# EAGLE board Middle Board - Power (EAGLE 8.6.0), part 1 of 2
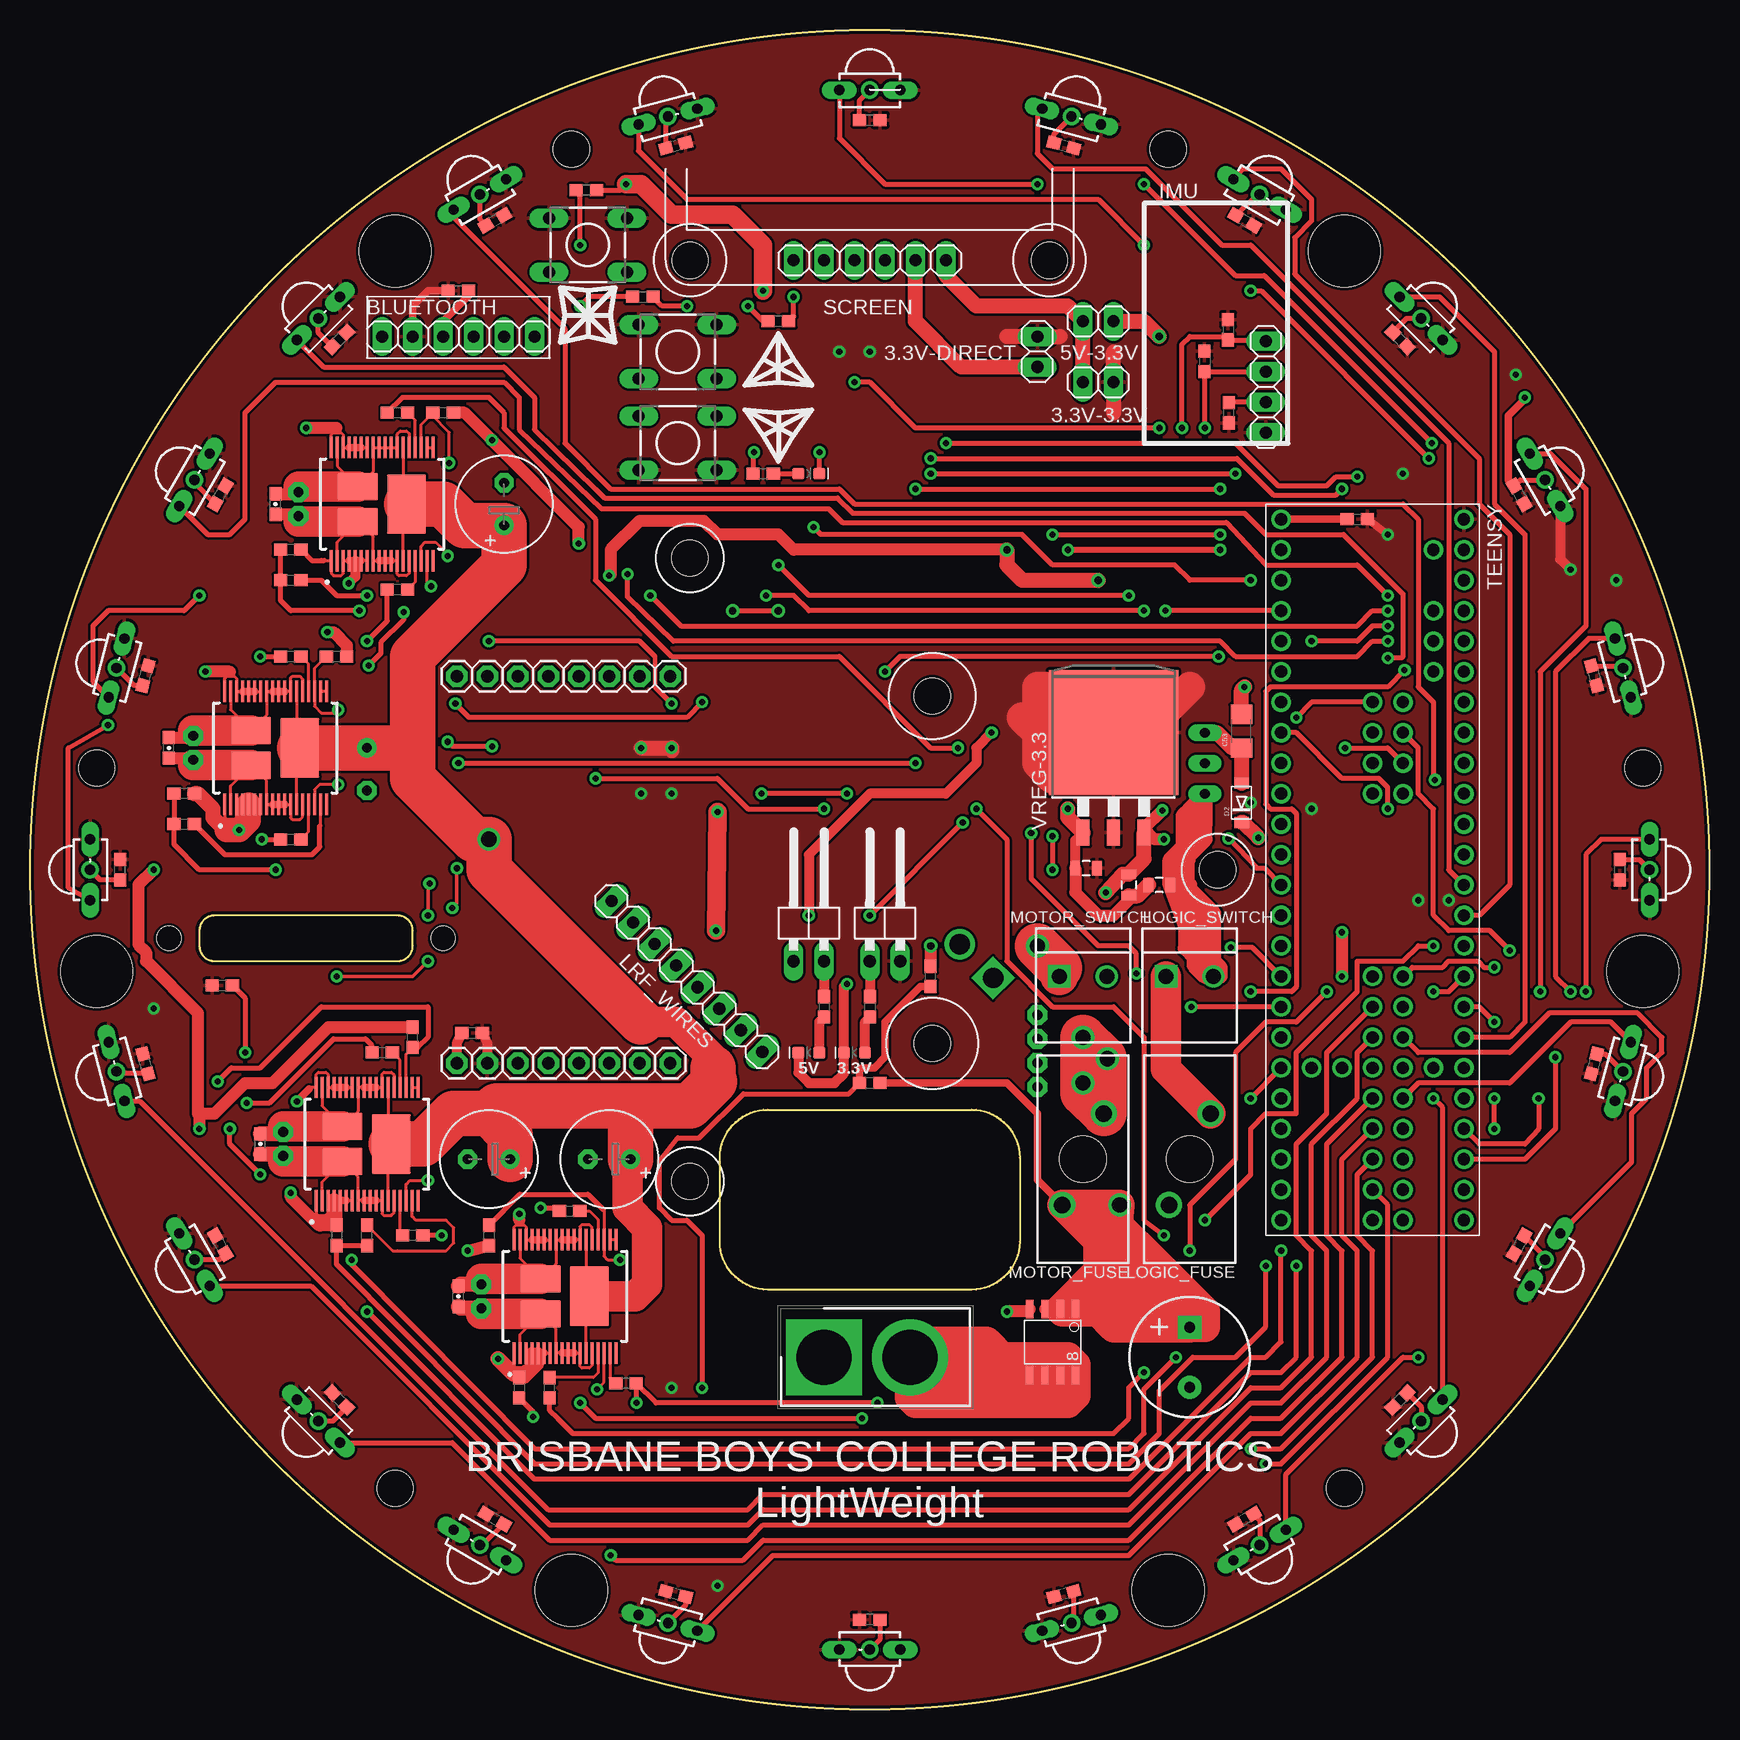
[diagram p0: board, top side]
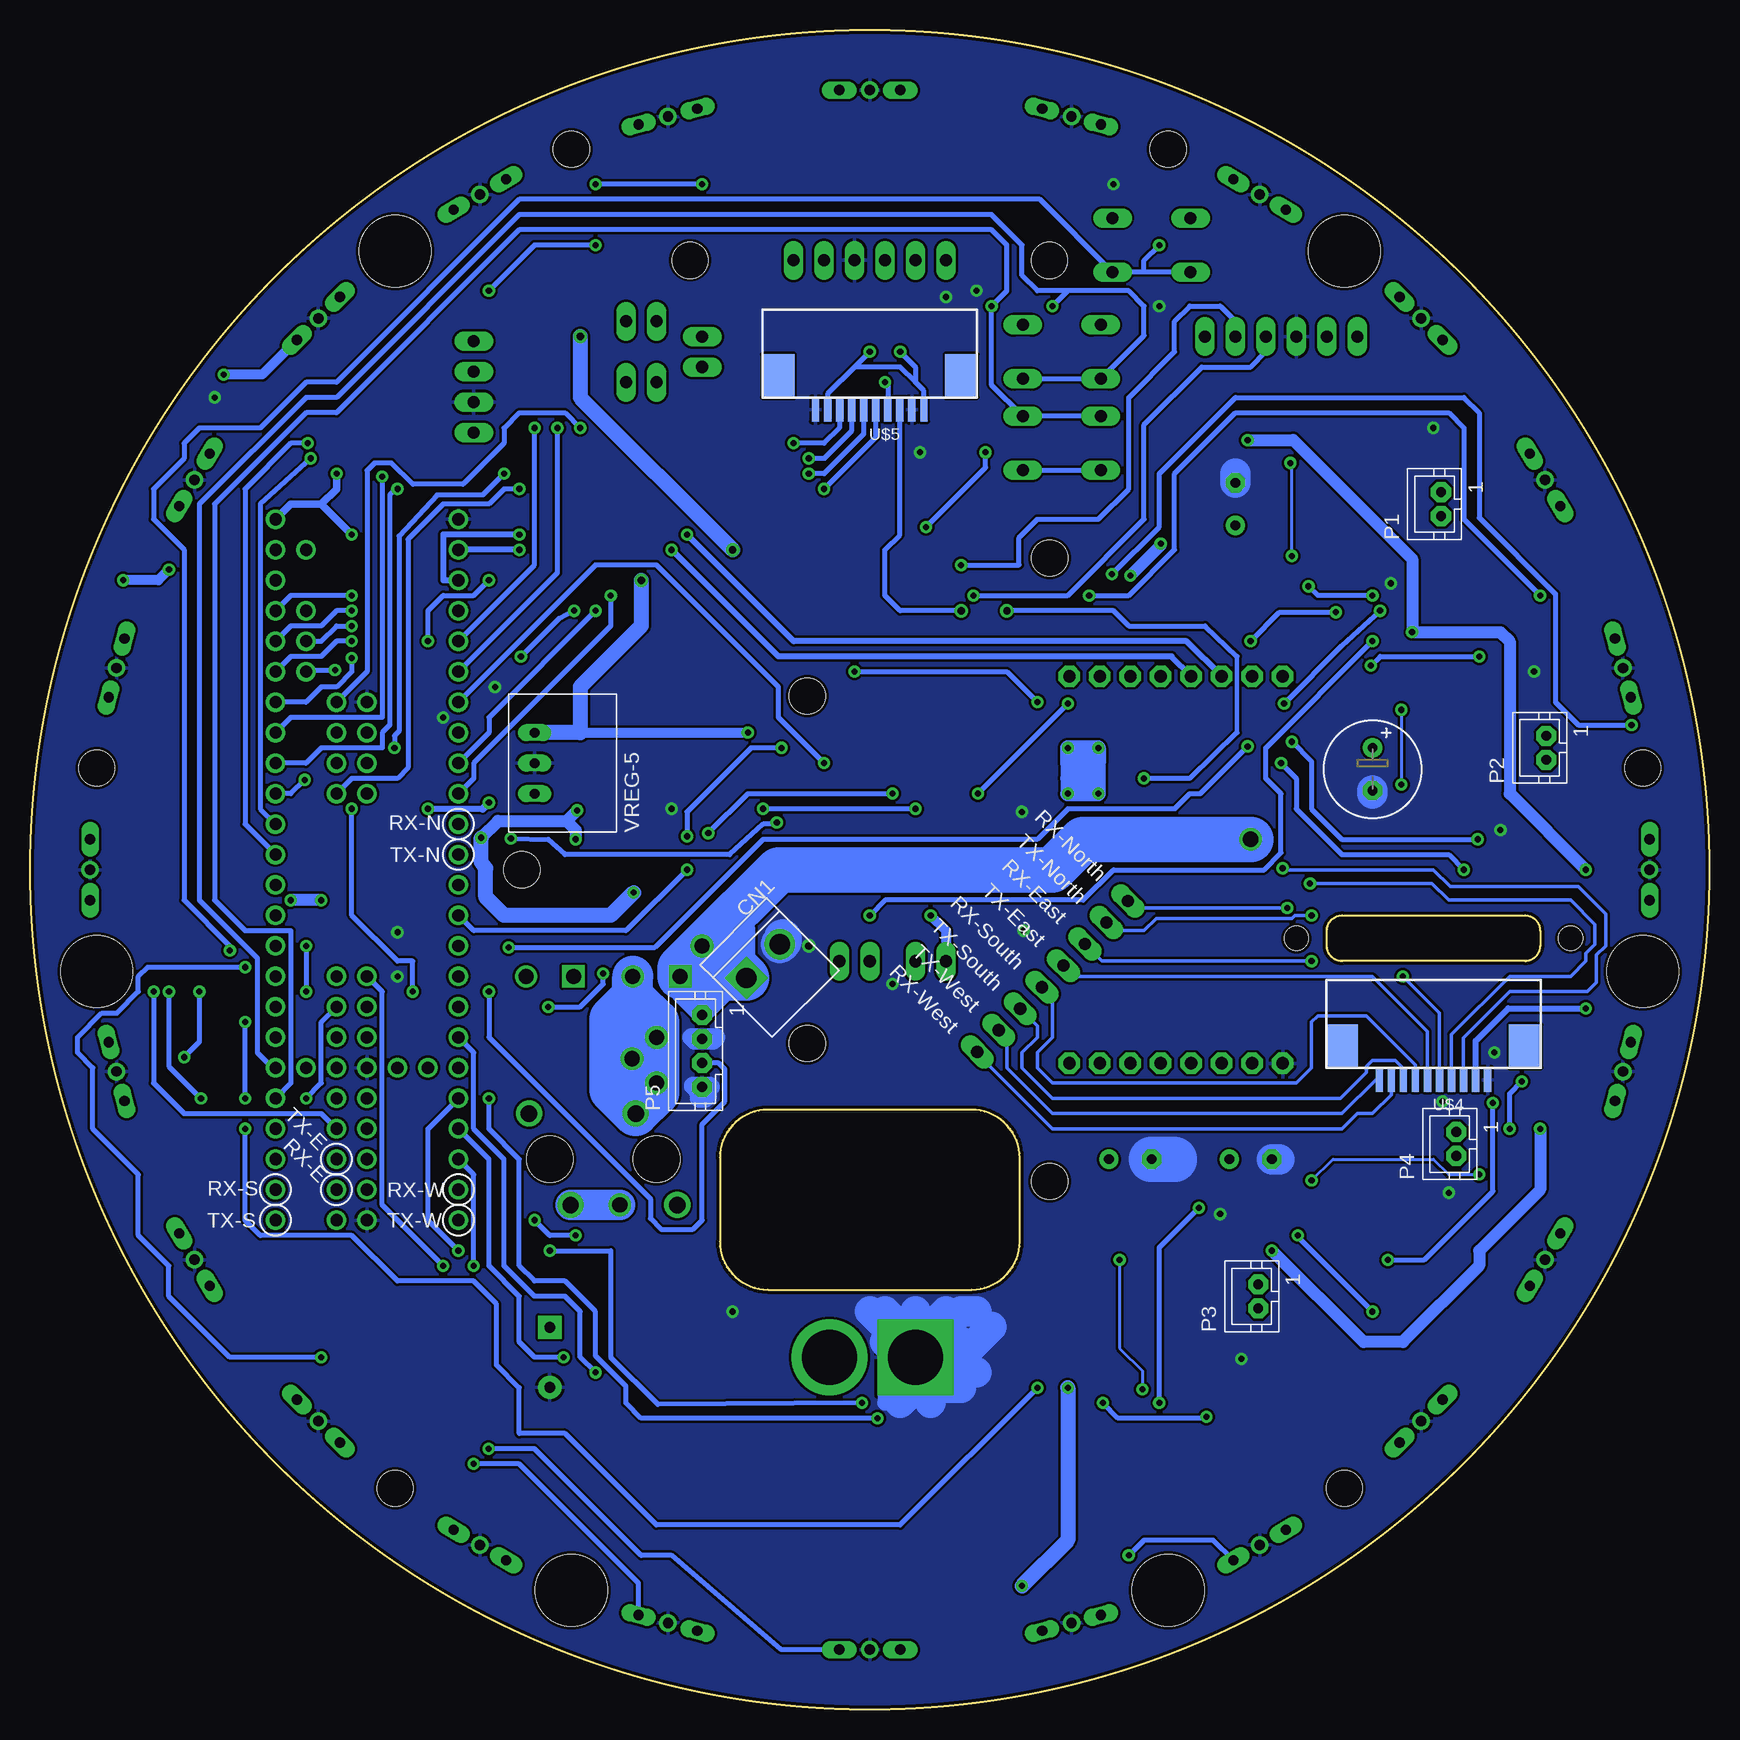
[diagram p1: board, bottom side, seen from below]

Size 140 x 140 mm. Coordinates in mm from the lower left corner, seen from the top.
Outline: 61.5,50 78.5,50 arc-90 82.5,46 82.5,39 arc-90 78.5,35 61.5,35 arc-90 57.5,39 57.5,46 arc-90 61.5,50
Outline: 14.12,64.92 14.12,63.65 arc90 15.39,62.38 30.63,62.38 arc90 31.9,63.65 31.9,64.92 arc90 30.63,66.19 15.39,66.19 arc90 14.12,64.92
Outline: circle at 70,70 radius 70
Copper layers (1*16): Top 0.035mm / dielectric 1.5mm / Bottom 0.035mm
Design rules "SparkFun": minimum track width 8mil, minimum drill 20mil, track to track 8mil, track to pad 8mil, pad to pad 8mil, via to via 8mil, smd to smd 8mil, copper to edge 10mil, drill to drill 8mil, minimum pad ring 12mil, minimum via ring 10mil, stop-mask expansion 4mil, vias tented up to drill 25mil, thermal gap 10mil
Net classes: 0 default: width 0.305 mm, clearance 0.152 mm
Holes 3 mm at 75.21,84.48 75.21,55.52 94.87,130.05 45.13,130.05 5.56,78.48 30.43,18.43 109.57,18.43 134.44,78.48 55,95.98 99,70 55,44.02 84.99,120.8 55.01,120.8
Holes 6 mm at 30.43,121.57 45.13,9.95 94.87,9.95 109.57,121.57 134.44,61.52 5.56,61.52
Holes 2 mm at 11.58,64.28 34.44,64.28

## Footprints (pad centres in the part's own frame; a part is rotated, then mirrored left to right if it is on the bottom)
LED-0603 = smd 1 x 1: A -0.877,0; C 0.877,0
1X02 = drill 1.016 long: 1 -1.27,0; 2 1.27,0
1X06 = drill 1.016 long: 1 -6.35,0; 2 -3.81,0; 3 -1.27,0; 4 1.27,0; 5 3.81,0; 6 6.35,0
0603 = smd 1.1 x 1: 1 -0.85,0; 2 0.85,0
CPOL-RADIAL-5MM-10MM = drill 0.9 pad 1.93 square: + 2.5,0 | drill 0.9 pad 1.93: - -2.5,0
SPARKFUN-CAPACITORS_0603-CAP = smd 1.1 x 1: 1 -0.85,0; 2 0.85,0
E3,5-8 = drill 0.813 pad 1.6: + -1.778,0 | drill 0.813 pad 1.6 octagon: - 1.778,0
SPARKFUN-CAPACITORS_0805 = smd 0.8 x 1.2: 1 -0.9,0; 2 0.9,0
SPARKFUN-CAPACITORS_1206 = smd 1.6 x 1.8: 1 -1.4,0; 2 1.4,0
B2P-VH = drill 1.7 square: 1 -1.98,0 | drill 1.7: 2 1.98,0
ADAFRUIT_SOD-123FL = smd 0.91 x 1.22: A 1.637,0; C -1.637,0
DTS-6 = drill 1 long: 1 -3.25,2.25; 2 3.25,2.25; 3 -3.25,-2.25; 4 3.25,-2.25
1X04 = drill 1.016 long: 1 -3.81,0; 2 -1.27,0; 3 1.27,0; 4 3.81,0
SHDR2W320P716_1X2_1574X813X158 = drill 4.572 pad 6.35 square: 1 0,0 | drill 4.572 pad 6.35: 2 7.163,0
1X02/90 = drill 1.016 long: 1 -1.27,-3.81; 2 1.27,-3.81
SL-1538 = drill 1.37 pad 2.184: P$1 1.73,3.81; P$2 -1.73,-3.81 | hole 3.88: 0,0
B2P-VH@1 = drill 1.25 square: 1 -1.98,0 | drill 1.24: 2 1.98,0
1X08 = drill 1.016 long: 1 -8.89,0; 2 -6.35,0; 3 -3.81,0; 4 -1.27,0; 5 1.27,0; 6 3.81,0; 7 6.35,0; 8 8.89,0
SOP50P1030X247-36N = smd 1.79 x 0.35: 1 -4.715,4.25; 2 -4.715,3.75; 3 -4.715,3.25; 4 -4.715,2.75; 5 -4.715,2.25; 6 -4.715,1.75; 7 -4.715,1.25; 8 -4.715,0.75; 9 -4.715,0.25; 10 -4.715,-0.25; 11 -4.715,-0.75; 12 -4.715,-1.25; 13 -4.715,-1.75; 14 -4.715,-2.25; 15 -4.715,-2.75; 16 -4.715,-3.25; 17 -4.715,-3.75; 18 -4.715,-4.25; 19 4.715,-4.25; 20 4.715,-3.75; 21 4.715,-3.25; 22 4.715,-2.75; 23 4.715,-2.25; 24 4.715,-1.75; 25 4.715,-1.25; 26 4.715,-0.75; 27 4.715,-0.25; 28 4.715,0.25; 29 4.715,0.75; 30 4.715,1.25; 31 4.715,1.75; 32 4.715,2.25; 33 4.715,2.75; 34 4.715,3.25; 35 4.715,3.75; 36 4.715,4.25 | smd 4.95 x 3.25: SLUG1 0,-2.025 | smd 2.286 x 3.302: SLUG2 -1.45,2.025; SLUG3 1.45,2.025
OPENMV3 = drill 1.016 pad 1.778 octagon: 11 1.651,19.304; 12 1.651,16.764; 13 1.651,14.224; 14 1.651,11.684; 15 1.651,9.144; 16 1.651,6.604; 17 1.651,4.064; 18 1.651,1.524; 21 33.909,19.304; 22 33.909,16.764; 23 33.909,14.224; 24 33.909,11.684; 25 33.909,9.144; 26 33.909,6.604; 27 33.909,4.064; 28 33.909,1.524
JST-PH2 = drill 0.813 pad 1.676 octagon: 1 1,0; 2 -1,0
JST-PH4 = drill 0.813 pad 1.676 octagon: 1 3,0; 2 1,0; 3 -1,0; 4 -3,0
TEENSY-3.5 = drill 1.016: 0 -7.62,26.67; 1 -7.62,24.13; 2 -7.62,21.59; 3 -7.62,19.05; 3.3V -7.62,-6.35; 3.3V-1 7.62,24.13; 3.3V-2 2.54,-29.21; 3.3V-3 -2.54,-16.51; 4 -7.62,16.51; 5 -7.62,13.97; 6 -7.62,11.43; 7 -7.62,8.89; 8 -7.62,6.35; 9 -7.62,3.81; 10 -7.62,1.27; 11 -7.62,-1.27; 12 -7.62,-3.81; 13 7.62,-3.81; 14 7.62,-1.27; 15 7.62,1.27; 16 7.62,3.81; 17 7.62,6.35; 18 7.62,8.89; 19 7.62,11.43; 20 7.62,13.97; 21 7.62,16.51; 22 7.62,19.05; 23 7.62,21.59; 24 -7.62,-8.89; 25 -7.62,-11.43; 26 -7.62,-13.97; 27 -7.62,-16.51; 28 -7.62,-19.05; 29 -7.62,-21.59; 30 -7.62,-24.13; 31 -7.62,-26.67; 32 -7.62,-29.21; 33 7.62,-29.21; 34 7.62,-26.67; 35 7.62,-24.13; 36 7.62,-21.59; 37 7.62,-19.05; 38 7.62,-16.51; 39 7.62,-13.97; 40 0,-8.89; 41 0,-11.43; 42 0,-13.97; 43 0,-19.05; 44 0,-21.59; 45 0,-24.13; 46 0,-26.67; 47 2.54,-26.67; 48 2.54,-24.13; 49 2.54,-21.59; 50 2.54,-19.05; 51 2.54,-13.97; 52 2.54,-11.43; 53 2.54,-8.89; 54 2.54,6.35; 55 2.54,8.89; 56 2.54,11.43; 57 2.54,13.97; A10 5.08,19.05; A11 5.08,16.51; AGND 7.62,26.67; AREF 5.08,21.59; DA0 7.62,-11.43; DA1 7.62,-8.89; DC 0,8.89; DD 0,6.35; DE 0,11.43; GND -7.62,29.21; GND-1 7.62,-6.35; GND-2 0,-29.21; GND-3 0,-16.51; GND-4 0,13.97; PRGRM 2.54,-16.51; RESET 5.08,-16.51; VBAT -5.08,-16.51; VIN 7.62,29.21; VUSB 5.08,26.67
MINICAST = drill 0.85 long: 1 0,2.54; 3 0,-2.54 | drill 0.85: 2 0,0
SO-8 = smd 1.524 x 0.61: 1 -2.743,1.905; 2 -2.743,0.635; 3 -2.743,-0.635; 4 -2.743,-1.905; 5 2.743,-1.905; 6 2.743,-0.635; 7 2.743,0.635; 8 2.743,1.905
FPC10 = smd 0.61 x 2.007: 1 -4.515,1.003; 2 -3.512,1.003; 3 -2.508,1.003; 4 -1.505,1.003; 5 -0.502,1.003; 6 0.502,1.003; 7 1.505,1.003; 8 2.508,1.003; 9 3.512,1.003; 10 4.515,1.003 | smd 2.667 x 3.607: N/C-1 -7.62,-1.803; N/C-2 7.62,-1.803
LINEAR_TO263-3 = smd 1.067 x 2.159: 1 -2.54,-5.791; 2 0,-5.791; 3 2.54,-5.791 | smd 10.8 x 10.41: TAB 0,2.54
V78-2000-SWITCHING-REGULATOR_V78-2000 = drill 0.8 long: 1 -2.54,0; 2 0,0; 3 2.54,0

## Placement (x,y rotation side)
3.3V  GREEN  [LED-0603]  68.73,54.76 180 top
3.3V-3.3V  [1X02]  89.05,110.64 180 top
3.3V-DIRECT  [1X02]  83.97,113.18 270 top
3.3V_ON1  GREEN  [LED-0603]  64.92,103.02 0 top
5V  GREEN  [LED-0603]  64.92,54.76 180 top
5V-3.3V  [1X02]  89.05,115.72 180 top
BLUETOOTH  [1X06]  35.71,114.45 0 top
C1  0.1uF  [0603]  70,132.5 0 top
C2  0.1uF  [0603]  86.18,130.37 345 top
C3  0.1uF  [0603]  101.25,124.13 330 top
C4  0.1uF  [0603]  114.19,114.19 315 top
C5  0.1uF  [0603]  124.13,101.25 300 top
C6  0.1uF  [0603]  130.37,86.18 285 top
C7  0.1uF  [0603]  132.5,70 270 top
C8  0.1uF  [0603]  130.37,53.82 255 top
C9  0.1uF  [0603]  124.13,38.75 240 top
C10  0.1uF  [0603]  114.19,25.81 225 top
C11  0.1uF  [0603]  101.25,15.87 210 top
C12  0.1uF  [0603]  86.18,9.63 195 top
C13  0.1uF  [0603]  70,7.5 180 top
C14  0.1uF  [0603]  53.82,9.63 165 top
C15  0.1uF  [0603]  38.75,15.87 150 top
C16  0.1uF  [0603]  25.81,25.81 135 top
C17  0.1uF  [0603]  15.87,38.75 120 top
C18  0.1uF  [0603]  9.63,53.82 105 top
C19  0.1uF  [0603]  7.5,70 90 top
C20  0.1uF  [0603]  9.63,86.18 75 top
C21  0.1uF  [0603]  15.87,101.25 60 top
C22  0.1uF  [0603]  25.81,114.19 45 top
C23  0.1uF  [0603]  38.75,124.13 30 top
C24  0.1uF  [0603]  53.82,130.37 15 top
C25  1mF  [CPOL-RADIAL-5MM-10MM]  96.67,29.36 90 top
C26  0.1UF_CAPACITOR_SMD  [SPARKFUN-CAPACITORS_0603-CAP]  20.47,100.48 90 top
C27  470uF  [E3,5-8]  39.52,100.48 90 top
C28  0.1UF_CAPACITOR_SMD  [SPARKFUN-CAPACITORS_0603-CAP]  11.58,80.16 90 top
C29  470uF  [E3,5-8]  28.09,78.38 270 bottom
C30  0.1UF_CAPACITOR_SMD  [SPARKFUN-CAPACITORS_0603-CAP]  35.71,34.44 90 top
C31  470uF  [E3,5-8]  48.28,45.87 180 top
C32  0.1UF_CAPACITOR_SMD  [SPARKFUN-CAPACITORS_0603-CAP]  19.2,47.14 90 top
C33  470uF  [E3,5-8]  38.25,45.87 180 top
C47  0.1uF  [0603]  16.02,60.35 180 top
C48  0.1uF  [0603]  35.71,118.26 0 top
C49  0.1uF  [0603]  99.95,108.1 90 top
C50  0.1uF  [0603]  110.64,99.21 0 top
C51  0.1uF  [0603]  36.85,56.41 0 top
C52  10uF  [SPARKFUN-CAPACITORS_0805]  94.13,68.73 180 top
C53  22uF  [SPARKFUN-CAPACITORS_1206]  100.99,81.56 90 top
C54  10uF  [SPARKFUN-CAPACITORS_0805]  91.59,68.73 270 top
C55  10uF  [SPARKFUN-CAPACITORS_0805]  88.03,70.13 180 top
CN1  [B2P-VH]  78.89,62.38 45 bottom
D2  [ADAFRUIT_SOD-123FL]  100.99,75.59 90 top
DOWN  DTS-6  [DTS-6]  54,113.18 0 top
IMU  [1X04]  103.02,110.26 90 top
J1  PRT-10474  [SHDR2W320P716_1X2_1574X813X158]  66.19,29.36 0 top
JP2  [1X02/90]  71.27,66.19 0 top
JP3  [1X02/90]  64.92,66.19 0 top
LOGIC_FUSE  FUSE_MINI_BLADE  [SL-1538]  96.67,45.87 180 top
LOGIC_SWITCH  CONN_02_JST-VH  [B2P-VH@1]  96.67,61.11 0 top
LRF_WIRES  [1X08]  54.76,61.11 135 top
MOTOR_1  [SOP50P1030X247-36N]  20.47,80.16 90 top
MOTOR_2  [SOP50P1030X247-36N]  44.6,34.44 90 top
MOTOR_3  [SOP50P1030X247-36N]  28.09,47.14 90 top
MOTOR_5  [SOP50P1030X247-36N]  29.36,100.48 90 top
MOTOR_FUSE  FUSE_MINI_BLADE  [SL-1538]  87.78,45.87 180 top
MOTOR_SWITCH  CONN_02_JST-VH  [B2P-VH@1]  87.78,61.11 0 top
OPEN-MV  OPENMV3  [OPENMV3]  34.06,87.78 270 top
P1  [JST-PH2]  22.38,100.48 90 bottom
P2  [JST-PH2]  13.61,80.16 90 bottom
P3  [JST-PH2]  37.62,34.44 90 bottom
P4  [JST-PH2]  21.1,47.14 90 bottom
P5  [JST-PH4]  83.97,54.89 90 bottom
R1  10k  [0603]  97.9,112.38 270 top
R2  10k  [0603]  99.87,115.01 270 top
R3  680  [0603]  66.19,58.57 270 top
R4  680  [0603]  70,58.57 270 top
R5  1k  [0603]  30.63,93.37 0 top
R6  1k  [0603]  30.63,108.1 0 top
R7  1k  [0603]  21.74,72.54 0 top
R8  1k  [0603]  21.74,87.78 0 top
R9  1k  [0603]  12.85,73.81 0 top
R10  1k  [0603]  12.85,76.35 180 top
R11  4.7k  [0603]  25.55,87.78 0 top
R12  1k  [0603]  43.33,26.82 90 top
R13  1k  [0603]  44.98,41.55 0 top
R14  1k  [0603]  49.68,27.2 180 top
R15  1k  [0603]  40.79,26.82 270 top
R16  4.7k  [0603]  38.25,39.52 270 top
R17  1k  [0603]  31.9,39.52 180 top
R18  1k  [0603]  29.36,54.76 0 top
R19  35.7kOhm  [0603]  70,52.22 180 top
R20  10.2kOhm  [0603]  75.08,61.11 90 top
R21  10k  [0603]  62.38,115.72 180 top
R22  10k  [0603]  51.08,117.75 0 top
R23  10k  [0603]  46.38,126.64 180 top
R24  1k  [0603]  21.74,94.13 0 top
R25  1k  [0603]  21.74,96.67 180 top
R26  4.7k  [0603]  34.44,108.1 0 top
R27  1k  [0603]  28.09,39.52 90 top
R28  1k  [0603]  25.55,39.52 270 top
R29  4.7k  [0603]  31.9,56.03 90 top
R30  680  [0603]  61.11,103.02 0 top
SCREEN  [1X06]  70,120.8 0 top
SELECT  DTS-6  [DTS-6]  46.5,122.07 0 top
TEENSY  TEENSY-3.5  [TEENSY-3.5]  111.91,70 0 top
TSSP1  TSSP58038  [MINICAST]  70,135 270 top
TSSP2  TSSP58038  [MINICAST]  86.82,132.79 255 top
TSSP3  TSSP58038  [MINICAST]  102.5,126.29 240 top
TSSP4  TSSP58038  [MINICAST]  115.96,115.96 225 top
TSSP5  TSSP58038  [MINICAST]  126.29,102.5 210 top
TSSP6  TSSP58038  [MINICAST]  132.79,86.82 195 top
TSSP7  TSSP58038  [MINICAST]  135,70 180 top
TSSP8  TSSP58038  [MINICAST]  132.79,53.18 165 top
TSSP9  TSSP58038  [MINICAST]  126.29,37.5 150 top
TSSP10  TSSP58038  [MINICAST]  115.96,24.04 135 top
TSSP11  TSSP58038  [MINICAST]  102.5,13.71 120 top
TSSP12  TSSP58038  [MINICAST]  86.82,7.21 105 top
TSSP13  TSSP58038  [MINICAST]  70,5 90 top
TSSP14  TSSP58038  [MINICAST]  53.18,7.21 75 top
TSSP15  TSSP58038  [MINICAST]  37.5,13.71 60 top
TSSP16  TSSP58038  [MINICAST]  24.04,24.04 45 top
TSSP17  TSSP58038  [MINICAST]  13.71,37.5 30 top
TSSP18  TSSP58038  [MINICAST]  7.21,53.18 15 top
TSSP19  TSSP58038  [MINICAST]  5,70 0 top
TSSP20  TSSP58038  [MINICAST]  7.21,86.82 345 top
TSSP21  TSSP58038  [MINICAST]  13.71,102.5 330 top
TSSP22  TSSP58038  [MINICAST]  24.04,115.96 315 top
TSSP23  TSSP58038  [MINICAST]  37.5,126.29 300 top
TSSP24  TSSP58038  [MINICAST]  53.18,132.79 285 top
U$2  SI4143DY  [SO-8]  85.24,30.63 270 top
U$4  FPC10  [FPC10]  23.01,53.49 180 bottom
U$5  FPC10  [FPC10]  70,109.37 180 bottom
UP  DTS-6  [DTS-6]  54,105.56 180 top
VREG-3.3  LINEAR_LM340S-05  [LINEAR_TO263-3]  90.32,78.89 0 top
VREG-5  V78-2000-SWITCHING-REGULATOR_V78-2000  [V78-2000-SWITCHING-REGULATOR_V78-2000]  97.94,78.89 90 bottom

## Library data of the parts
3.3V 3.3V_ON1 5V = SparkFun-LED
3.3V-3.3V 3.3V-DIRECT 5V-3.3V BLUETOOTH IMU JP2 JP3 LRF_WIRES SCREEN = PinHead+
C1-C24 C47-C51 = SparkFun-Capacitors; PROD_ID: CAP-00810
C25 = SparkFun-Capacitors; PROD_ID: CAP-09538
C26 C28 C30 C32 C52-C55 = Capacitors
C27 C29 C31 C33 = rcl
CN1 LOGIC_SWITCH MOTOR_SWITCH = jst-vh
D2 VREG-3.3 VREG-5 = Main
DOWN SELECT UP = switch-tact
J1 = XT60; ARROW_PART_NUMBER: PRT-10474; DESCRIPTION: Soldering Workstation Equipment XT60 Connectors Male/Female Pair; HEIGHT: 15.875mm; MANUFACTURER_NAME: SparkFun; MANUFACTURER_PART_NUMBER: PRT-10474
LOGIC_FUSE MOTOR_FUSE = Fuse_Holder
MOTOR_1-MOTOR_3 MOTOR_5 = VNH5050ATR-E; A1_MAX: 0.32; A1_MIN: 0.23; A1_NOM: 0.275; A_MAX: 2.47; A_MIN: 2.15; A_NOM: 2.31; B_MAX: 0.36; B_MIN: 0.18; B_NOM: 0.27; D2_MAX: 0.0; D2_MIN: None; D2_NOM: None; D_MAX: 10.5; D_MIN: 10.1; D_NOM: 10.3; E1_MAX: 7.6; E1_MIN: 7.4; E1_NOM: 7.5; E2_MAX: 0.0; E2_MIN: None; E2_NOM: None; ENOM: 0.5; E_MAX: 10.5; E_MIN: 10.1; E_NOM: 10.3; L_MAX: 1.0; L_MIN: 0.6; L_NOM: 0.8; MANUFACTURER: STMicroelectronics; PIN_COUNT: 36.0; SNAPEDA_PACKAGE_ID: 23434
OPEN-MV = OpenMV
P1-P5 = jst-ph
R1 R2 R21-R23 = SparkFun-Resistors; PROD_ID: RES-00824
R3 R4 R30 = SparkFun-Resistors
R5-R10 R12-R15 R17 R18 R24 R25 R27 R28 = SparkFun-Resistors; PROD_ID: RES-07856
R11 R16 R26 R29 = SparkFun-Resistors; PROD_ID: RES-07857
R19 R20 = SparkFun-Resistors; PROD_ID: RES-09737
TEENSY = teensy-3.5
TSSP1-TSSP24 = IR Receivers
U$2 = mosfet
U$4 U$5 = FFC

## Nets
3.3V: 3.3V-3.3V.1 3.3V-DIRECT.1 BLUETOOTH.2 C1.2 C2.2 C3.2 C4.2 C5.2 C6.2 C7.2 C8.2 C9.2 C10.2 C11.2 C12.2 C13.2 C14.2 C15.2 C16.2 C17.2 C18.2 C19.2 C20.2 C21.2 C22.2 C23.2 C24.2 C47.2 C48.1 C49.1 C50.2 C51.2 C55.1 DOWN.1 DOWN.2 IMU.1 JP2.2 OPEN-MV.27 R1.1 R2.1 SELECT.1 SELECT.2 TEENSY.VIN TSSP1.1 TSSP2.1 TSSP3.1 TSSP4.1 TSSP5.1 TSSP6.1 TSSP7.1 TSSP8.1 TSSP9.1 TSSP10.1 TSSP11.1 TSSP12.1 TSSP13.1 TSSP14.1 TSSP15.1 TSSP16.1 TSSP17.1 TSSP18.1 TSSP19.1 TSSP20.1 TSSP21.1 TSSP22.1 TSSP23.1 TSSP24.1 U$4.2 U$5.1 U$5.9 UP.1 UP.2 VREG-3.3.2 VREG-3.3.TAB
3.3V_ON: JP2.1 R4.1
5V: 5V-3.3V.1 C53.1 D2.A JP3.1 R11.2 R16.2 R26.2 R29.2 VREG-5.3
5V-ON: JP3.2 R3.1
12V: C27.+ C29.+ C31.+ C33.+ CN1.1 MOTOR_1.13 MOTOR_1.24 MOTOR_1.SLUG1 MOTOR_2.13 MOTOR_2.24 MOTOR_2.SLUG1 MOTOR_3.13 MOTOR_3.24 MOTOR_3.SLUG1 MOTOR_5.13 MOTOR_5.24 MOTOR_5.SLUG1 MOTOR_SWITCH.1 P5.1
BATTERY-VOLTAGE(ANALOG): R19.2 R20.1 TEENSY.DA0
BDOWN: DOWN.3 DOWN.4 R22.2 TEENSY.38
BSELECT: R23.2 SELECT.3 SELECT.4 TEENSY.56
BUP: R21.2 TEENSY.37 UP.3 UP.4
GND: 3.3V.C 3.3V_ON1.C 5V.C BLUETOOTH.3 C1.1 C2.1 C3.1 C4.1 C5.1 C6.1 C7.1 C8.1 C9.1 C10.1 C11.1 C12.1 C13.1 C14.1 C15.1 C16.1 C17.1 C18.1 C19.1 C20.1 C21.1 C22.1 C23.1 C24.1 C25.- C27.- C29.- C31.- C33.- C47.1 C48.2 C49.2 C50.1 C51.1 C52.2 C53.2 C54.2 C55.2 CN1.2 IMU.2 J1.1 MOTOR_1.1 MOTOR_1.3 MOTOR_1.4 MOTOR_1.5 MOTOR_1.6 MOTOR_1.7 MOTOR_1.30 MOTOR_1.31 MOTOR_1.32 MOTOR_1.33 MOTOR_1.34 MOTOR_1.36 MOTOR_2.1 MOTOR_2.3 MOTOR_2.4 MOTOR_2.5 MOTOR_2.6 MOTOR_2.7 MOTOR_2.30 MOTOR_2.31 MOTOR_2.32 MOTOR_2.33 MOTOR_2.34 MOTOR_2.36 MOTOR_3.1 MOTOR_3.3 MOTOR_3.4 MOTOR_3.5 MOTOR_3.6 MOTOR_3.7 MOTOR_3.30 MOTOR_3.31 MOTOR_3.32 MOTOR_3.33 MOTOR_3.34 MOTOR_3.36 MOTOR_5.1 MOTOR_5.3 MOTOR_5.4 MOTOR_5.5 MOTOR_5.6 MOTOR_5.7 MOTOR_5.30 MOTOR_5.31 MOTOR_5.32 MOTOR_5.33 MOTOR_5.34 MOTOR_5.36 OPEN-MV.28 P5.2 P5.4 R10.1 R15.1 R20.2 R21.1 R22.1 R23.1 R25.1 R28.1 SCREEN.4 TEENSY.GND TEENSY.GND-2 TEENSY.GND-3 TEENSY.GND-4 TSSP1.2 TSSP2.2 TSSP3.2 TSSP4.2 TSSP5.2 TSSP6.2 TSSP7.2 TSSP8.2 TSSP9.2 TSSP10.2 TSSP11.2 TSSP12.2 TSSP13.2 TSSP14.2 TSSP15.2 TSSP16.2 TSSP17.2 TSSP18.2 TSSP19.2 TSSP20.2 TSSP21.2 TSSP22.2 TSSP23.2 TSSP24.2 U$2.4 U$4.1 U$5.2 U$5.10 VREG-3.3.1 VREG-5.2
INDICATOR-LED: R30.1 TEENSY.A10
KICKER-SIG: P5.3 TEENSY.A11
LS-CONTROL1: TEENSY.19 U$5.8
LS-CONTROL2: TEENSY.18 U$5.7
LS-CONTROL3: TEENSY.55 U$5.6
LS-CONTROL4: TEENSY.54 U$5.5
LS-CONTROL5: TEENSY.57 U$5.4
LS-OUTPUT: TEENSY.DA1 U$5.3
MOTOR-BL(ENA): R17.1 TEENSY.28
MOTOR-BL(ENB): R18.1 TEENSY.29
MOTOR-BL(PWM): R27.1 R28.2 TEENSY.30
MOTOR-BR(ENA): R12.1 TEENSY.26
MOTOR-BR(ENB): R13.1 TEENSY.27
MOTOR-BR(PWM): R14.1 R15.2 TEENSY.6
MOTOR-FL(ENA): R7.1 TEENSY.24
MOTOR-FL(ENB): R8.1 TEENSY.25
MOTOR-FL(PWM): R9.1 R10.2 TEENSY.5
MOTOR-FR(ENA): R5.1 TEENSY.11
MOTOR-FR(ENB): R6.1 TEENSY.12
MOTOR-FR(PWM): R24.1 R25.2 TEENSY.2
N$1: J1.2 U$2.5 U$2.6 U$2.7 U$2.8
N$2: MOTOR_FUSE.P$2 MOTOR_SWITCH.2
N$3: C25.+ LOGIC_FUSE.P$1 MOTOR_FUSE.P$1 R19.1 U$2.1 U$2.2 U$2.3
N$4: LOGIC_FUSE.P$2 LOGIC_SWITCH.1
N$5: MOTOR_1.15 R7.2
N$6: 5V.A R3.2
N$7: 3.3V.A R4.2
N$8: MOTOR_5.15 R5.2
N$9: MOTOR_5.17 R24.2
N$10: MOTOR_5.22 R6.2
N$11: C26.1 MOTOR_5.2 MOTOR_5.8 MOTOR_5.9 MOTOR_5.10 MOTOR_5.11 MOTOR_5.12 MOTOR_5.14 MOTOR_5.SLUG2 P1.2
N$12: MOTOR_1.22 R8.2
N$13: MOTOR_5.19 MOTOR_5.20
N$14: C26.2 MOTOR_5.23 MOTOR_5.25 MOTOR_5.26 MOTOR_5.27 MOTOR_5.28 MOTOR_5.29 MOTOR_5.35 MOTOR_5.SLUG3 P1.1
N$15: MOTOR_1.17 R9.2
N$16: MOTOR_1.19 MOTOR_1.20
N$17: C28.2 MOTOR_1.23 MOTOR_1.25 MOTOR_1.26 MOTOR_1.27 MOTOR_1.28 MOTOR_1.29 MOTOR_1.35 MOTOR_1.SLUG3 P2.1
N$18: C28.1 MOTOR_1.2 MOTOR_1.8 MOTOR_1.9 MOTOR_1.10 MOTOR_1.11 MOTOR_1.12 MOTOR_1.14 MOTOR_1.SLUG2 P2.2
N$19: MOTOR_1.16 MOTOR_1.21 R11.1
N$20: MOTOR_2.15 R12.2
N$21: MOTOR_2.22 R13.2
N$22: MOTOR_2.17 R14.2
N$23: MOTOR_2.19 MOTOR_2.20
N$24: C30.2 MOTOR_2.23 MOTOR_2.25 MOTOR_2.26 MOTOR_2.27 MOTOR_2.28 MOTOR_2.29 MOTOR_2.35 MOTOR_2.SLUG3 P3.1
N$25: C30.1 MOTOR_2.2 MOTOR_2.8 MOTOR_2.9 MOTOR_2.10 MOTOR_2.11 MOTOR_2.12 MOTOR_2.14 MOTOR_2.SLUG2 P3.2
N$26: MOTOR_2.16 MOTOR_2.21 R16.1
N$27: MOTOR_3.15 R17.2
N$28: MOTOR_3.22 R18.2
N$29: MOTOR_3.17 R27.2
N$30: MOTOR_3.19 MOTOR_3.20
N$31: C32.2 MOTOR_3.23 MOTOR_3.25 MOTOR_3.26 MOTOR_3.27 MOTOR_3.28 MOTOR_3.29 MOTOR_3.35 MOTOR_3.SLUG3 P4.1
N$32: C32.1 MOTOR_3.2 MOTOR_3.8 MOTOR_3.9 MOTOR_3.10 MOTOR_3.11 MOTOR_3.12 MOTOR_3.14 MOTOR_3.SLUG2 P4.2
N$33: MOTOR_5.16 MOTOR_5.21 R26.1
N$34: MOTOR_3.16 MOTOR_3.21 R29.1
N$35: 3.3V-DIRECT.2 SCREEN.5
N$36: 3.3V_ON1.A R30.2
N$37: 3.3V-3.3V.2 5V-3.3V.2 SCREEN.6
N$40: C52.1 LOGIC_SWITCH.2 VREG-5.1
N$41: C54.1 D2.C VREG-3.3.3
RX(BLUETOOTH): BLUETOOTH.5 TEENSY.8
RX(CAM): OPEN-MV.16 TEENSY.1
RX-E: TEENSY.47
RX-N: TEENSY.9
RX-S: TEENSY.34
RX-W: TEENSY.31
RXE: LRF_WIRES.6 U$4.5
RXN: LRF_WIRES.8 U$4.3
RXS: LRF_WIRES.4 U$4.7
RXW: LRF_WIRES.1 U$4.9
SCL(IMU): IMU.3 R1.2 TEENSY.3
SCREEN(SCL): SCREEN.2
SCREEN(SDA): SCREEN.1
SDA(IMU): IMU.4 R2.2 TEENSY.4
TSSP1: TEENSY.15 TSSP1.3
TSSP2: TEENSY.14 TSSP2.3
TSSP3: TEENSY.13 TSSP3.3
TSSP4: TEENSY.39 TSSP4.3
TSSP5: TEENSY.35 TSSP5.3
TSSP6: TEENSY.36 TSSP6.3
TSSP7: TEENSY.49 TSSP7.3
TSSP8: TEENSY.50 TSSP8.3
TSSP9: TEENSY.51 TSSP9.3
TSSP10: TEENSY.52 TSSP10.3
TSSP11: TEENSY.53 TSSP11.3
TSSP12: TEENSY.46 TSSP12.3
TSSP13: TEENSY.45 TSSP13.3
TSSP14: TEENSY.44 TSSP14.3
TSSP15: TEENSY.43 TSSP15.3
TSSP16: TEENSY.42 TSSP16.3
TSSP17: TEENSY.41 TSSP17.3
TSSP18: TEENSY.40 TSSP18.3
TSSP19: TEENSY.21 TSSP19.3
TSSP20: TEENSY.22 TSSP20.3
TSSP21: TEENSY.23 TSSP21.3
TSSP22: TEENSY.20 TSSP22.3
TSSP23: TEENSY.17 TSSP23.3
TSSP24: TEENSY.16 TSSP24.3
TX(BLUETOOTH): BLUETOOTH.4 TEENSY.7
TX(CAM): OPEN-MV.15 TEENSY.0
TX-E: TEENSY.48
TX-N: TEENSY.10
TX-S: TEENSY.33
TX-W: TEENSY.32
TXE: LRF_WIRES.5 U$4.6
TXN: LRF_WIRES.7 U$4.4
TXS: LRF_WIRES.3 U$4.8
TXW: LRF_WIRES.2 U$4.10